# Altium PCB PCB2.PcbDoc
Units mm, origin at the board's own origin, x right, y up, seen from the top; angles counter-clockwise.
Board outline 36.58 x 42.05 mm, 2 copper layers (Top Layer, Bottom Layer), stack 1.57 mm thick; 30 components, 23 nets, 99 pads, 0 vias.
Unrouted connection lines stored in the file: 63.
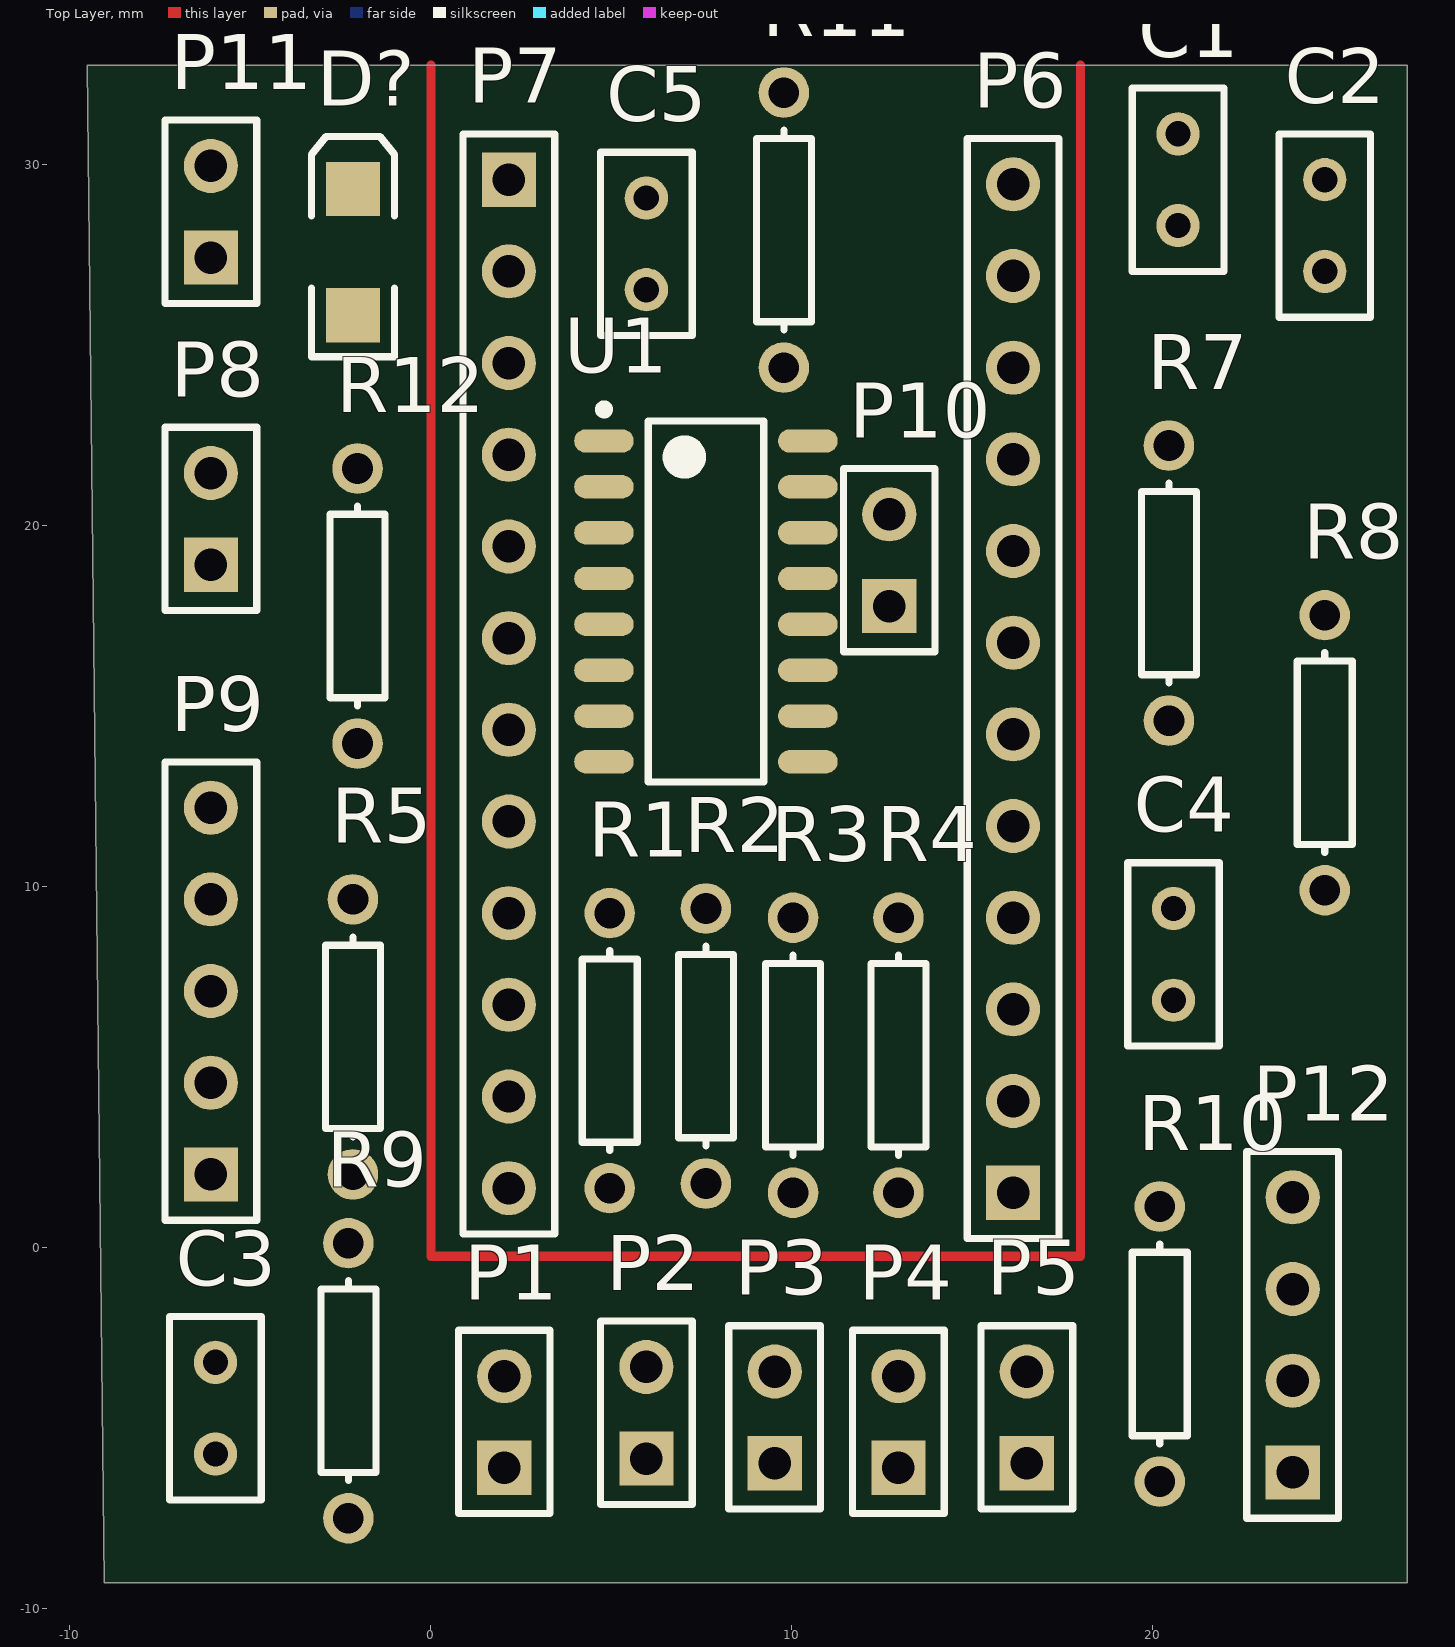
[diagram p0: Top Layer view]
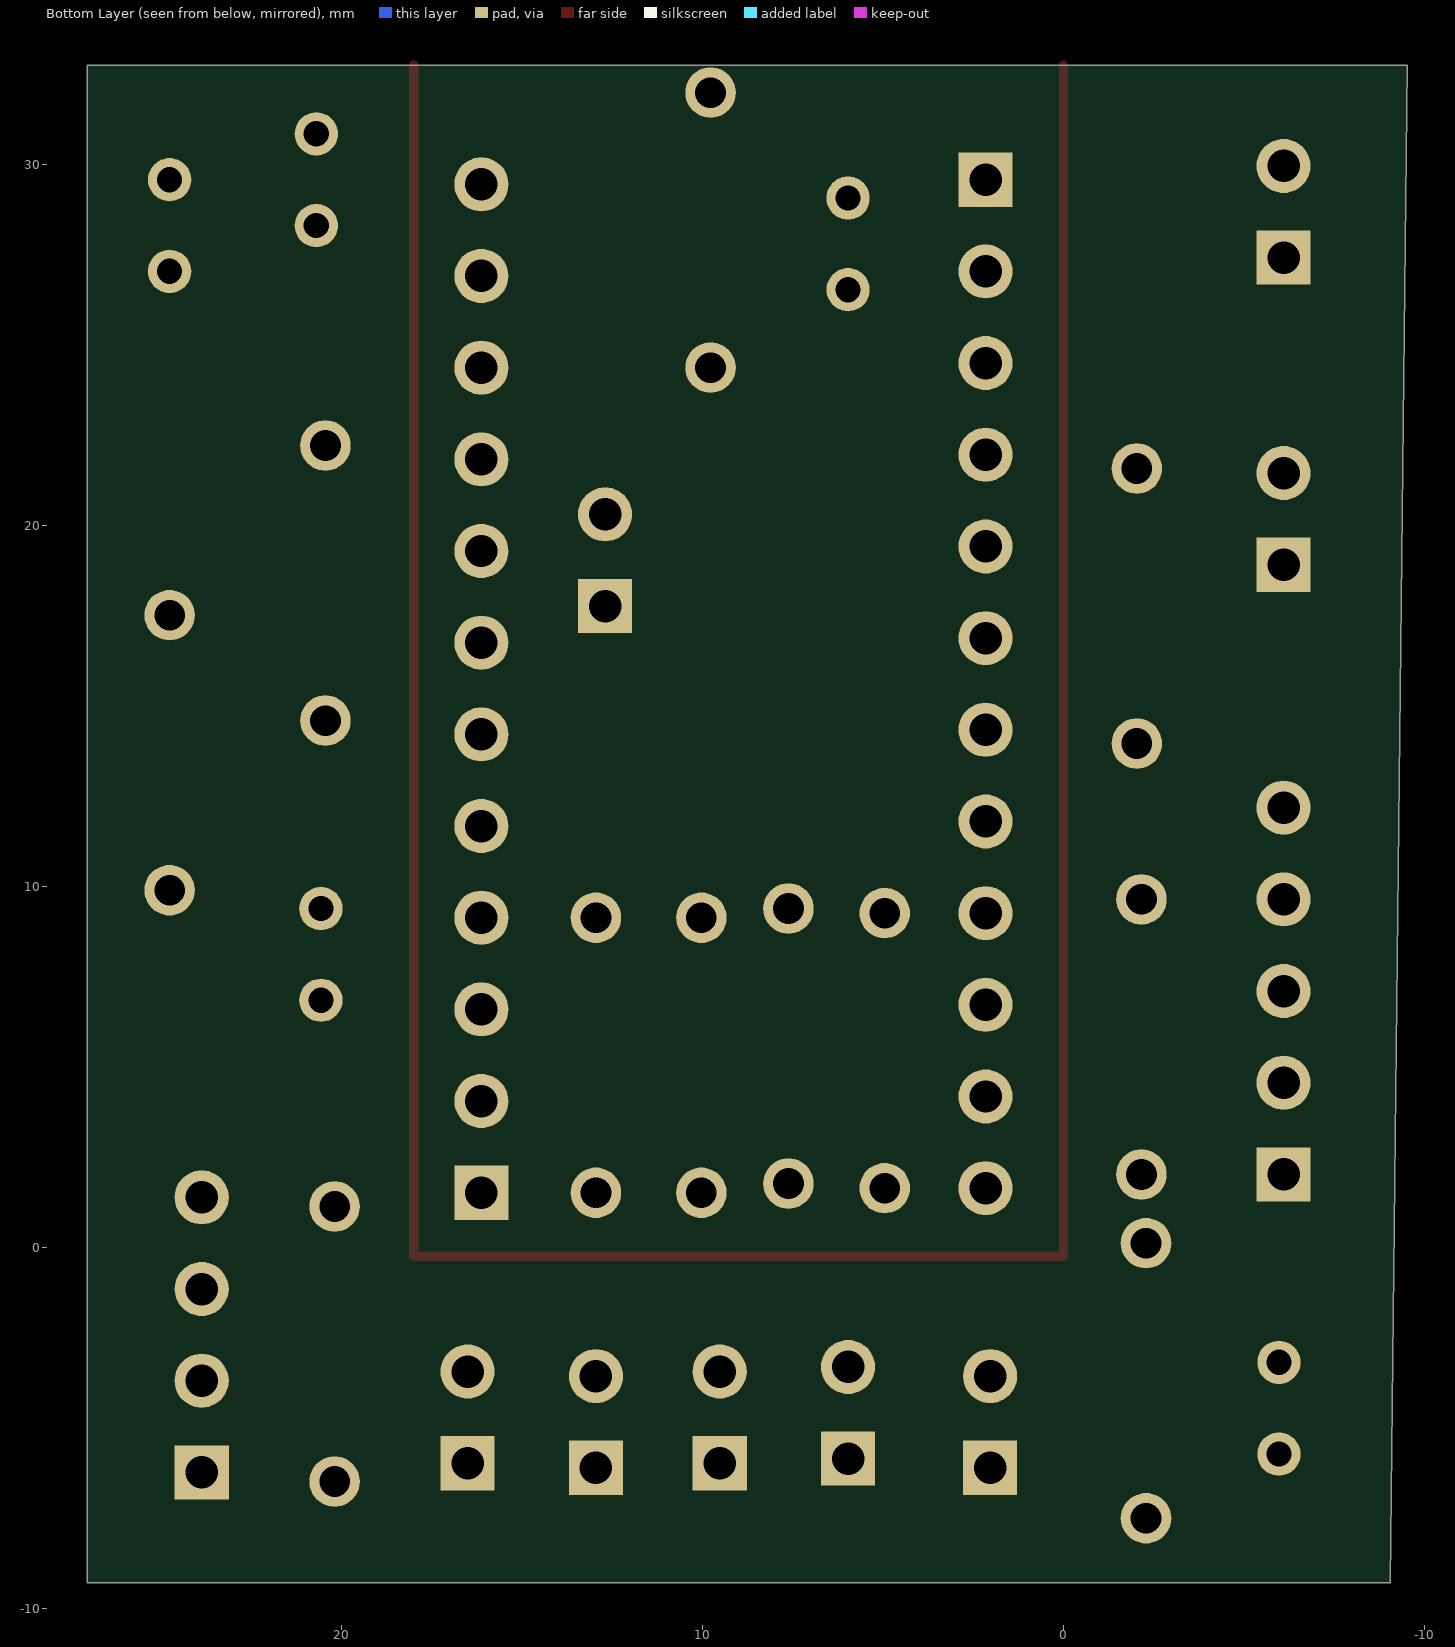
[diagram p1: Bottom Layer view, seen from below]

## Layer stack, top to bottom
Top Solder: solder mask 0.016, Solder Resist, Dk 3.5
Top Layer: signal copper 0.035
Dielectric 1: dielectric 1.5, FR-4, Dk 4.8
Bottom Layer: signal copper 0.035
Bottom Solder: solder mask 0.016, Solder Resist, Dk 3.5

## Board outline
-9.051,-9.285 27.051,-9.285 27.051,32.766 -9.525,32.766

## Design rules (kind name [scope] priority, off if disabled: settings)
Clearance [All] p1: gap=0.254 ignorepadtopadclearanceinfootprint=FALSE except(0: Arc-Hole Track-Hole SMDPad-Hole THPad-Hole Via-Hole Fill-Hole Poly-Hole Region-Hole Text-Hole)
PolygonConnect [All] p1: connectstyle=Relief reliefconductorwidth=0.254 reliefentries=4 polygonreliefangle="90 Angle" airgapwidth=0.254
RoutingVias [All] p1: holewidth=0.711 width=1.27 viastyle="Through Hole" minholewidth=0.711 minwidth=1.27 maxholewidth=0.711 maxwidth=1.27
SolderMaskExpansion [All] p1: expansion=0.102
Width [All] p1: maxlimit=0.254 minlimit=0.254 preferedwidth=0.254
30 further rules are at their usual default settings.

## Components (designator, comment, footprint, x,y, rotation, side; value= is the part's Value field where it differs from the comment)
C1 "Cap" RAD-0.1 20.701,29.591 r90 top value=1uF
C2 "Cap" RAD-0.1 24.765,28.321 r90 top value=1uF
C3 "Cap" RAD-0.1 -5.969,-4.445 r90 top value=1uF
C4 "Cap" RAD-0.1 20.574,8.128 r90 top value=1uF
C5 "Cap" RAD-0.1 5.969,27.813 r90 top value=1uF
D? "GREEN" 3.2X1.6X1.1 -2.159,27.587 r90 top
P1 "pinky" HDR1X2 2.032,-6.096 r90 top
P2 "ring" HDR1X2 5.969,-5.842 r90 top
P3 "middle" HDR1X2 9.525,-5.969 r90 top
P4 "index" HDR1X2 12.954,-6.096 r90 top
P5 "thumb" HDR1X2 16.51,-5.969 r90 top
P6 "Header 12" HDR1X12 16.129,1.524 r90 top
P7 "Header 12" HDR1X12 2.159,29.591 r270 top
P8 "TOGGLE" HDR1X2 -6.096,18.923 r90 top
P9 "Header 5" HDR1X5 -6.096,2.032 r90 top
P10 "IMU HEADER" HDR1X2 12.7,17.78 r90 top
P11 "BATTERY" HDR1X2 -6.096,27.432 r90 top
P12 "ADAFRUIT BNO055" HDR1X4 23.876,-6.223 r90 top
R1 "Res1" AXIAL-0.3 4.953,5.461 r90 top value=47K
R2 "Res1" AXIAL-0.3 7.62,5.588 r90 top value=47K
R3 "Res1" AXIAL-0.3 10.033,5.334 r90 top value=47K
R4 "Res1" AXIAL-0.3 12.954,5.334 r90 top value=47K
R5 "Res1" AXIAL-0.3 -2.159,5.842 r90 top value=47K
R7 "Res1" AXIAL-0.3 20.447,18.415 r90 top value=10M
R8 "Res1" AXIAL-0.3 24.765,13.716 r90 top value=10M
R9 "Res1" AXIAL-0.3 -2.286,-3.683 r90 top value=10M
R10 "Res1" AXIAL-0.3 20.193,-2.667 r90 top value=10M
R11 "Res1" AXIAL-0.3 9.779,28.194 r90 top value=10M
R12 "Res1" AXIAL-0.3 -2.032,17.78 r90 top value=240
U1 "CD4051BM96G3" D0016A_M 7.62,17.907 r0 top

## Footprints (in the part's own frame and the unit in brackets; to place one, negate y for a bottom-side part, rotate by r counter-clockwise, add the part's x,y. Pads: shape width x height; smd on the part's side, far side on the other; paste and mask are expansions set on the pad)
3.2X1.6X1.1 [mm] "SMT LED; 2 Flat Leads"
  rect 1.5x1.5 smd: 1(-1.75,0) 2(1.75,0)
  silkscreen extent -2.9,-1.15 3.2,1.15
AXIAL-0.3 [mm] "Axial Device, Thru-Hole; 2 Leads; 0.3 in Pin Spacing"
  round 1.4 hole 0.85: 1(-3.81,0) 2(3.81,0)
  silkscreen extent -2.77,-0.76 2.77,0.76
D0016A_M [mm] "SOIC, 16-Leads, Body 10x4mm, Pitch 1.27mm, IPC Low Density"
  oval 1.65x0.65 smd: 1(-2.825,4.445) 2(-2.825,3.175) 3(-2.825,1.905) 4(-2.825,0.635) 5(-2.825,-0.635) 6(-2.825,-1.905) 7(-2.825,-3.175) 8(-2.825,-4.445) 9(2.825,-4.445) 10(2.825,-3.175) 11(2.825,-1.905) 12(2.825,-0.635) 13(2.825,0.635) 14(2.825,1.905) 15(2.825,3.175) 16(2.825,4.445)
  silkscreen extent -2.95,-5 1.6,5.44, body extent -3,-4.95 3,4.95, height 1.59
HDR1X2 [mm] "Connector; Header; 2 Position"
  rect 1.5x1.5 hole 0.9: 1(0,0)
  round 1.5 hole 0.9: 2(2.54,0)
  silkscreen extent -1.27,-1.27 3.81,1.27
HDR1X4 [mm] "Connector; Header; 4 Position"
  rect 1.5x1.5 hole 0.9: 1(0,0)
  round 1.5 hole 0.9: 2(2.54,0) 3(5.08,0) 4(7.62,0)
  silkscreen extent -1.27,-1.27 8.89,1.27
HDR1X5 [mm] "Connector; Header; 5 Position"
  rect 1.5x1.5 hole 0.9: 1(0,0)
  round 1.5 hole 0.9: 2(2.54,0) 3(5.08,0) 4(7.62,0) 5(10.16,0)
  silkscreen extent -1.27,-1.27 11.43,1.27
HDR1X12 [mm] "Connector; Header; 12 Position"
  rect 1.5x1.5 hole 0.9: 1(0,0)
  round 1.5 hole 0.9: 2(2.54,0) 3(5.08,0) 4(7.62,0) 5(10.16,0) 6(12.7,0) 7(15.24,0) 8(17.78,0) 9(20.32,0) 10(22.86,0) 11(25.4,0) 12(27.94,0)
  silkscreen extent -1.27,-1.27 29.21,1.27
RAD-0.1 [mm] "Radial Cap, Thru-Hole; 2 Leads; 0.1 in Pin Spacing"
  round 1.2 hole 0.7: 1(-1.27,0) 2(1.27,0)
  silkscreen extent -2.54,-1.27 2.54,1.27

## Part data
C1 C2 C3 C4 C5: "Capacitor", LatestRevisionDate=17-Jul-2002, LatestRevisionNote="Re-released for DXP Platform.", PackageDescription="Radial Cap, Thru-Hole; 2 Leads; 0.3 in Pin Spacing", PackageReference=RAD-0.3, Published=8-Jun-2000, Publisher="Altium Limited"
D?: library part LED2, "Typical RED, GREEN, YELLOW, AMBER GaAs LED", LatestRevisionDate=17-Jul-2002, LatestRevisionNote="Re-released for DXP Platform.", PackageDescription="SM LED; 2 Flat Leads", PackageReference=3.2X1.6X1.1, PackageVersion=Feb-2002, Published=8-Jun-2000, Publisher="Altium Limited"
P1 P2 P3 P4 P5 P8 P10 P11: library part "Header 2", "Header, 2-Pin", LatestRevisionDate=17-Jul-2002, LatestRevisionNote="Re-released for DXP Platform.", Publisher="Altium Limited"
P6 P7: "Header, 12-Pin", LatestRevisionDate=17-Jul-2002, LatestRevisionNote="Re-released for DXP Platform.", Publisher="Altium Limited"
P9: "Header, 5-Pin", LatestRevisionDate=17-Jul-2002, LatestRevisionNote="Re-released for DXP Platform.", Publisher="Altium Limited"
P12: library part "Header 4", "Header, 4-Pin", LatestRevisionDate=17-Jul-2002, LatestRevisionNote="Re-released for DXP Platform.", Publisher="Altium Limited"
R1 R2 R3 R4 R5 R7 R8 R9 R10 R11 R12: "Resistor", LatestRevisionDate=17-Jul-2002, LatestRevisionNote="Re-released for DXP Platform.", PackageDescription="Axial Device, Thru-Hole; 2 Leads; 0.3 in Pin Spacing", PackageReference=AXIAL-0.3, Published=8-Jun-2000, Publisher="Altium Limited"
U1: library part CMP-1575-00039-2, "CMOS Single 8-Channel Analog Multiplexer/Demultiplexer with Logic-Level Conversion, D0016A, LARGE T&R", Operating Temperature Range(C)="-55 to 125", Part Number=CD4051B, Rating=Military, Bandwidth(Max)(MHz)=20, Code_IPC="MS-012 variation AC", ComponentLink1Description="Manufacturer URL", ComponentLink1URL=http://www.ti.com/, ComponentLink2Description=Datasheet, ComponentLink2URL=http://www.ti.com/lit/ds/symlink/cd4051b.pdf, Configuration="1 X 1:8 MUX", Crosstalk=Yes, DatasheetVersion=SCHS047G, ICC(Typ)(mA)=0.00008, Output Drive (IOL/IOH)(Max)(mA)=1, Output Type=CMOS, PackageReference=D0016A, PackageVersion=http://www.ti.com/lit/ml/mpds178g/mpds178g.pdf, PartNumber=CD4051BM96G3, Ron(Max)(Ohms)=240, Ron(Typ)(Ohms)=125, VCC(Max)(V)=18, VCC(Min)(V)=5

## Nets (pads, with @x,y where several pads share a name; then routed paths per layer and width w, separated by ;. In a path a pad name is that pad's centre, name@x,y a point inside that pad or via, vN(x,y) a via of type N, cw(c..) or ccw(c..) an arc to the next point about the centre after c; other vN are vias at no path point)
A0: P6.5 U1.3
A4: P10.1 P12.2
A5: P10.2 P12.1
GND: C1.2 C2.2 C3.2 C4.2 C5.2 P6.11 P7.4 P11.1 P12.3 R1.1 R2.1 R3.1 R4.1 R5.1 R12.1 U1.6 U1.7 U1.8
NetD?_2: D?.2 R12.2
NetP1_2: P1.2 R1.2 U1.1
NetP2_2: P2.2 R2.2 U1.12
NetP3_2: P3.2 R3.2 U1.15
NetP4_2: P4.2 R4.2 U1.14
NetP5_2: P5.2 R5.2 U1.13
NetP7_9: P7.9 R10.1
NetP8_1: P8.1 P11.2
PIN2: C5.1 P7.5 P9.5 R11.1
PIN4: P7.7 R7.2 R8.2 R9.2 R10.2 R11.2
PIN6: C4.1 P9.4
PIN7: C3.1 P7.10 P9.3 R9.1
PIN8: C2.1 P7.11 P9.2 R8.1
PIN9: C1.1 P7.12 P9.1 R7.1
PIN10: P6.1 U1.9
PIN11: P6.2 U1.10
PIN12: P6.3 U1.11
RAW: D?.1 P6.12 P8.2
VCC: P1.1 P2.1 P3.1 P4.1 P5.1 P6.9 P12.4 U1.16
pads on no net: P6.4 P6.6 P6.7 P6.8 P6.10 P7.1 P7.2 P7.3 P7.6 P7.8 U1.2 U1.4 U1.5
copper on no net: | length 84
  Top Layer w0.254: 0,32.766 0,-0.234 18,-0.234 18,32.766